# EAGLE board Micro_QWERTY (EAGLE 9.1.3), part 1 of 2
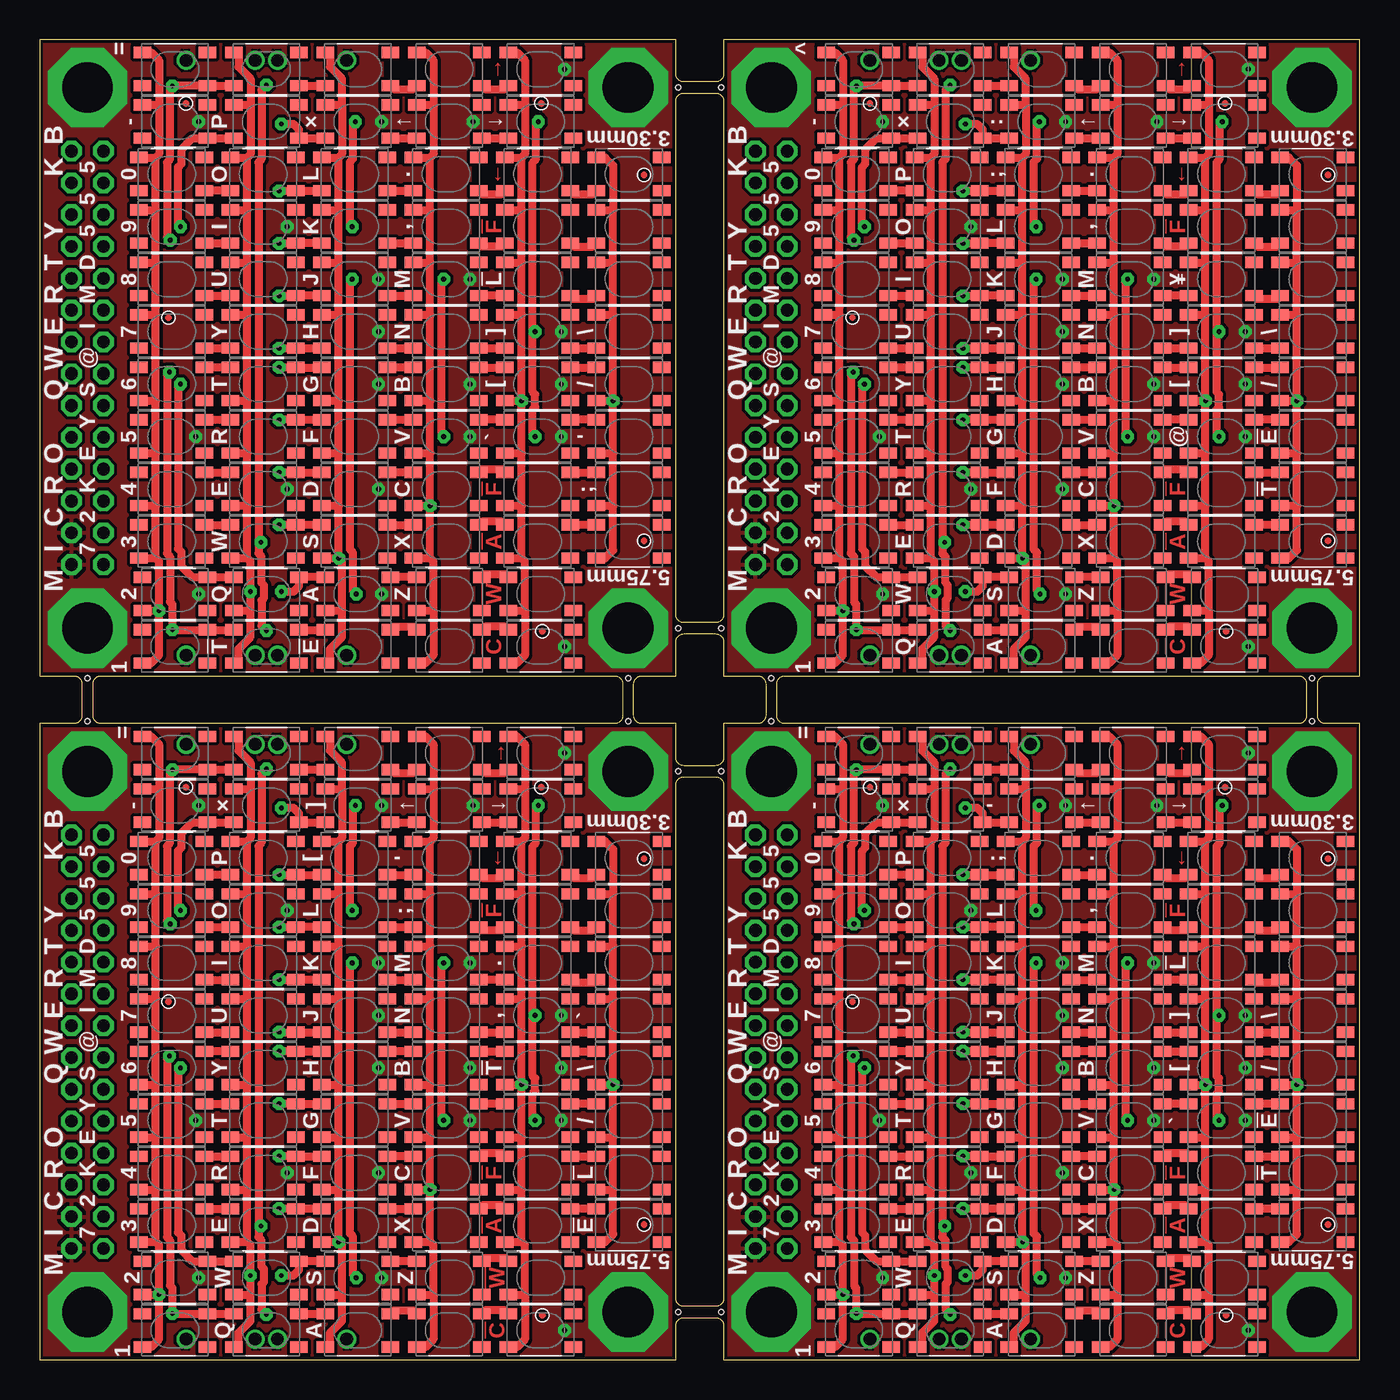
[diagram p0: board, top side]
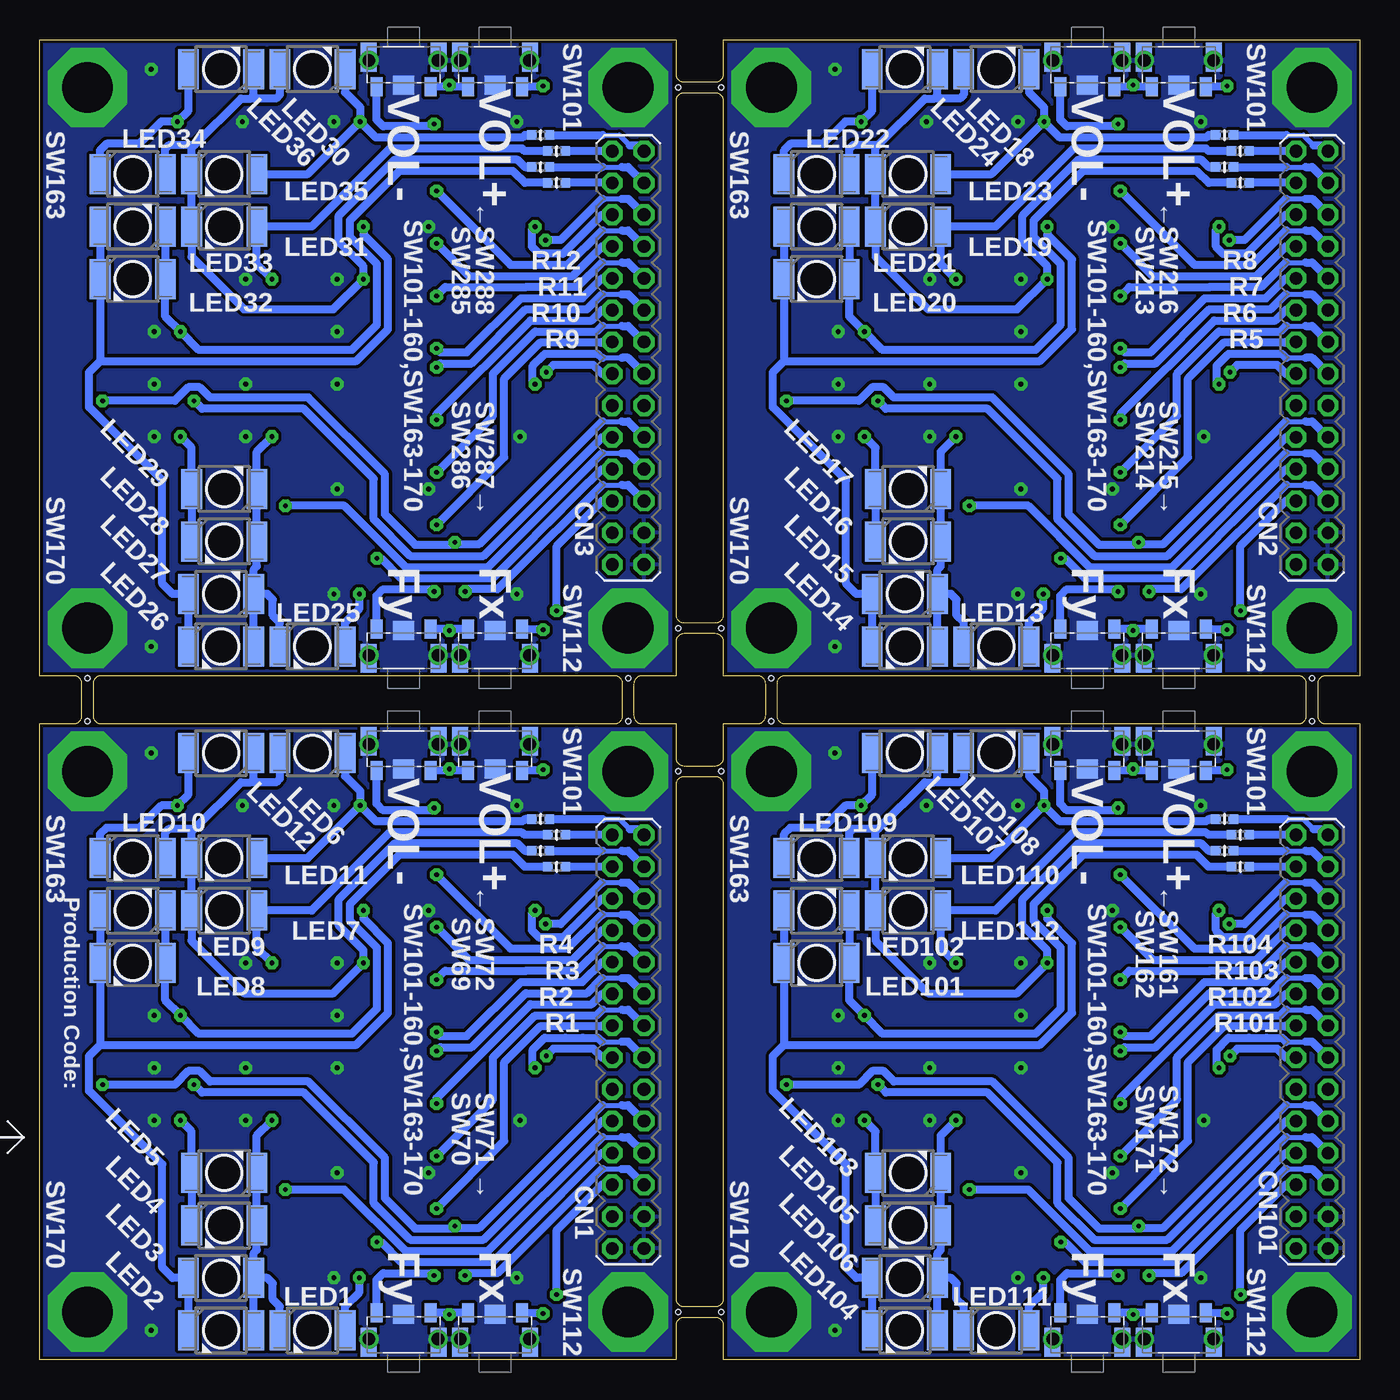
[diagram p1: board, bottom side, seen from below]

Size 83 x 83 mm. Coordinates in mm from the lower left corner, seen from the top.
Outline: 43,0 83,0 83,40 80.85,40 arc-90 80.35,40.5 80.35,42.5 arc-90 80.85,43 83,43 83,83 43,83 43,80.85 arc-90 42.5,80.35 40.5,80.35 arc-90 40,80.85 40,83 0,83 0,43 2.15,43 arc-90 2.65,42.5 2.65,40.5 arc-90 2.15,40 0,40 0,0 40,0 40,2.15 arc-90 40.5,2.65 42.5,2.65 arc-90 43,2.15 43,0
Outline: 79.15,40 46.85,40 arc-90 46.35,40.5 46.35,42.5 arc-90 46.85,43 79.15,43 arc-90 79.65,42.5 79.65,40.5 arc-90 79.15,40
Outline: 45.15,40 43,40 43,37.85 arc-90 42.5,37.35 40.5,37.35 arc-90 40,37.85 40,40 37.85,40 arc-90 37.35,40.5 37.35,42.5 arc-90 37.85,43 40,43 40,45.15 arc-90 40.5,45.65 42.5,45.65 arc-90 43,45.15 43,43 45.15,43 arc-90 45.65,42.5 45.65,40.5 arc-90 45.15,40
Outline: 43,36.15 43,3.85 arc-90 42.5,3.35 40.5,3.35 arc-90 40,3.85 40,36.15 arc-90 40.5,36.65 42.5,36.65 arc-90 43,36.15
Outline: 36.15,40 3.85,40 arc-90 3.35,40.5 3.35,42.5 arc-90 3.85,43 36.15,43 arc-90 36.65,42.5 36.65,40.5 arc-90 36.15,40
Outline: 40,46.85 40,79.15 arc-90 40.5,79.65 42.5,79.65 arc-90 43,79.15 43,46.85 arc-90 42.5,46.35 40.5,46.35 arc-90 40,46.85
Copper layers (1*16): Top 0.035mm / dielectric 1.5mm / Bottom 0.035mm
Design rules "SeeedStudio_2layer_DRU_no_angle_20140221_IMD555 *": minimum track width 0.2mm, minimum drill 0.3mm, track to track 0.2mm, track to pad 0.16mm, pad to pad 0.2mm, via to via 0.2mm, smd to smd 0mil, copper to edge 0.2mm, drill to drill 10mil, minimum pad ring 0.2mm, minimum via ring 0.2mm, stop-mask expansion 0.03mm, vias tented up to drill 5mm, thermal gap 10mil
Holes 0.3 mm at 42.85,37 42.85,3 40.15,3 40.15,37 3,40.15 37,40.15 80,40.15 46,40.15 40.15,46 40.15,80 42.85,80 42.85,46 80,42.85 46,42.85 3,42.85 37,42.85
tRestrict: area 0,39.8 to 83,43.2; area 39.8,0 to 43.2,83
bRestrict: area 39.8,0 to 43.2,83; area 0,39.8 to 83,43.2

## Footprints (pad centres in the part's own frame; a part is rotated, then mirrored left to right if it is on the bottom)
2MM_14X2_R = drill 0.8 pad 1.3 octagon: 1 -13,1; 2 -13,-1; 3 -11,1; 4 -11,-1; 5 -9,1; 6 -9,-1; 7 -7,1; 8 -7,-1; 9 -5,1; 10 -5,-1; 11 -3,1; 12 -3,-1; 13 -1,1; 14 -1,-1; 15 1,1; 16 1,-1; 17 3,1; 18 3,-1; 19 5,1; 20 5,-1; 21 7,1; 22 7,-1; 23 9,1; 24 9,-1; 25 11,1; 26 11,-1; 27 13,1; 28 13,-1
P-LCC-2-TOPLED-RG-WINDOW = smd 2.5 x 1.3: A 0,2.05; C 0,-2.05
R0402-SS = smd 0.6 x 0.6: 1 -0.55,0; 2 0.55,0
TVAU10-025 = smd 1.1 x 0.7: P$1 -2.05,1.05; P$2 2.05,1.05; P$3 -2.05,-1.05; P$4 2.05,-1.05
THAM05 = smd 0.75 x 1.2: P$1 -1.7,-1.65; P$2 1.7,-1.65 | drill 0.8 pad 0.8: S1 -2.175,0; S2 2.175,0 | smd 1.3 x 1.2: S3 0,-1.55 | smd 1 x 1.8: S4 -2.2,0.2; S5 2.2,0.2

## Placement (x,y rotation side)
CN1  14X2R  [2MM_14X2_R]  46,20 90 bottom
CN2  14X2R  [2MM_14X2_R]  3,63 90 bottom
CN3  14X2R  [2MM_14X2_R]  46,63 90 bottom
CN101  14X2R  [2MM_14X2_R]  3,20 90 bottom
LED1  Shift_Left  [P-LCC-2-TOPLED-RG-WINDOW]  65.85,1.85 270 bottom
LED2  Ctrl  [P-LCC-2-TOPLED-RG-WINDOW]  71.6,1.85 270 bottom
LED3  Win  [P-LCC-2-TOPLED-RG-WINDOW]  71.6,5.15 90 bottom
LED4  Alt  [P-LCC-2-TOPLED-RG-WINDOW]  71.4,8.45 270 bottom
LED5  Fn_Left  [P-LCC-2-TOPLED-RG-WINDOW]  71.4,11.75 90 bottom
LED6  Shift_Right  [P-LCC-2-TOPLED-RG-WINDOW]  65.85,38.15 90 bottom
LED7  Fn_Right  [P-LCC-2-TOPLED-RG-WINDOW]  71.4,28.25 270 bottom
LED8  M1  [P-LCC-2-TOPLED-RG-WINDOW]  77.15,24.95 270 bottom
LED9  M2  [P-LCC-2-TOPLED-RG-WINDOW]  77.15,28.25 90 bottom
LED10  M3  [P-LCC-2-TOPLED-RG-WINDOW]  77.15,31.55 270 bottom
LED11  Cursor_Left  [P-LCC-2-TOPLED-RG-WINDOW]  71.4,31.55 270 bottom
LED12  Cursor_Right  [P-LCC-2-TOPLED-RG-WINDOW]  71.6,38.15 90 bottom
LED13  Shift_Left  [P-LCC-2-TOPLED-RG-WINDOW]  22.85,44.85 270 bottom
LED14  Ctrl  [P-LCC-2-TOPLED-RG-WINDOW]  28.6,44.85 270 bottom
LED15  Win  [P-LCC-2-TOPLED-RG-WINDOW]  28.6,48.15 90 bottom
LED16  Alt  [P-LCC-2-TOPLED-RG-WINDOW]  28.4,51.45 270 bottom
LED17  Fn_Left  [P-LCC-2-TOPLED-RG-WINDOW]  28.4,54.75 90 bottom
LED18  Shift_Right  [P-LCC-2-TOPLED-RG-WINDOW]  22.85,81.15 90 bottom
LED19  Fn_Right  [P-LCC-2-TOPLED-RG-WINDOW]  28.4,71.25 270 bottom
LED20  M1  [P-LCC-2-TOPLED-RG-WINDOW]  34.15,67.95 270 bottom
LED21  M2  [P-LCC-2-TOPLED-RG-WINDOW]  34.15,71.25 90 bottom
LED22  M3  [P-LCC-2-TOPLED-RG-WINDOW]  34.15,74.55 270 bottom
LED23  Cursor_Left  [P-LCC-2-TOPLED-RG-WINDOW]  28.4,74.55 270 bottom
LED24  Cursor_Right  [P-LCC-2-TOPLED-RG-WINDOW]  28.6,81.15 90 bottom
LED25  Shift_Left  [P-LCC-2-TOPLED-RG-WINDOW]  65.85,44.85 270 bottom
LED26  Ctrl  [P-LCC-2-TOPLED-RG-WINDOW]  71.6,44.85 270 bottom
LED27  Win  [P-LCC-2-TOPLED-RG-WINDOW]  71.6,48.15 90 bottom
LED28  Alt  [P-LCC-2-TOPLED-RG-WINDOW]  71.4,51.45 270 bottom
LED29  Fn_Left  [P-LCC-2-TOPLED-RG-WINDOW]  71.4,54.75 90 bottom
LED30  Shift_Right  [P-LCC-2-TOPLED-RG-WINDOW]  65.85,81.15 90 bottom
LED31  Fn_Right  [P-LCC-2-TOPLED-RG-WINDOW]  71.4,71.25 270 bottom
LED32  M1  [P-LCC-2-TOPLED-RG-WINDOW]  77.15,67.95 270 bottom
LED33  M2  [P-LCC-2-TOPLED-RG-WINDOW]  77.15,71.25 90 bottom
LED34  M3  [P-LCC-2-TOPLED-RG-WINDOW]  77.15,74.55 270 bottom
LED35  Cursor_Left  [P-LCC-2-TOPLED-RG-WINDOW]  71.4,74.55 270 bottom
LED36  Cursor_Right  [P-LCC-2-TOPLED-RG-WINDOW]  71.6,81.15 90 bottom
LED101  M1  [P-LCC-2-TOPLED-RG-WINDOW]  34.15,24.95 270 bottom
LED102  M2  [P-LCC-2-TOPLED-RG-WINDOW]  34.15,28.25 90 bottom
LED103  Fn_Left  [P-LCC-2-TOPLED-RG-WINDOW]  28.4,11.75 90 bottom
LED104  Ctrl  [P-LCC-2-TOPLED-RG-WINDOW]  28.6,1.85 270 bottom
LED105  Alt  [P-LCC-2-TOPLED-RG-WINDOW]  28.4,8.45 270 bottom
LED106  Win  [P-LCC-2-TOPLED-RG-WINDOW]  28.6,5.15 90 bottom
LED107  Cursor_Right  [P-LCC-2-TOPLED-RG-WINDOW]  28.6,38.15 90 bottom
LED108  Shift_Right  [P-LCC-2-TOPLED-RG-WINDOW]  22.85,38.15 90 bottom
LED109  M3  [P-LCC-2-TOPLED-RG-WINDOW]  34.15,31.55 270 bottom
LED110  Cursor_Left  [P-LCC-2-TOPLED-RG-WINDOW]  28.4,31.55 270 bottom
LED111  Shift_Left  [P-LCC-2-TOPLED-RG-WINDOW]  22.85,1.85 270 bottom
LED112  Fn_Right  [P-LCC-2-TOPLED-RG-WINDOW]  28.4,28.25 270 bottom
R1  [R0402-SS]  50.5,31 0 bottom
R2  [R0402-SS]  51.5,32 0 bottom
R3  [R0402-SS]  50.5,33 0 bottom
R4  [R0402-SS]  51.5,34 0 bottom
R5  [R0402-SS]  7.5,74 0 bottom
R6  [R0402-SS]  8.5,75 0 bottom
R7  [R0402-SS]  7.5,76 0 bottom
R8  [R0402-SS]  8.5,77 0 bottom
R9  [R0402-SS]  50.5,74 0 bottom
R10  [R0402-SS]  51.5,75 0 bottom
R11  [R0402-SS]  50.5,76 0 bottom
R12  [R0402-SS]  51.5,77 0 bottom
R101  [R0402-SS]  7.5,31 0 bottom
R102  [R0402-SS]  8.5,32 0 bottom
R103  [R0402-SS]  7.5,33 0 bottom
R104  [R0402-SS]  8.5,34 0 bottom
SW1  SKRP(ALPS)  [TVAU10-025]  51.5,1.85 0 top
SW2  SW_4PTVAU10-025  [TVAU10-025]  57.25,1.85 0 top
SW3  SW_4PTVAU10-025  [TVAU10-025]  63,1.85 0 top
SW4  SW_4PTVAU10-025  [TVAU10-025]  68.75,1.85 0 top
SW5  SW_4PTVAU10-025  [TVAU10-025]  74.5,1.85 0 top
SW6  SW_4PTVAU10-025  [TVAU10-025]  51.5,5.15 0 top
SW7  SW_4PTVAU10-025  [TVAU10-025]  57.25,5.15 0 top
SW8  SW_4PTVAU10-025  [TVAU10-025]  63,5.15 0 top
SW9  SW_4PTVAU10-025  [TVAU10-025]  68.75,5.15 0 top
SW10  SW_4PTVAU10-025  [TVAU10-025]  74.5,5.15 0 top
SW11  SW_4PTVAU10-025  [TVAU10-025]  51.3,8.45 0 top
SW12  SW_4PTVAU10-025  [TVAU10-025]  57.05,8.45 0 top
SW13  SW_4PTVAU10-025  [TVAU10-025]  62.8,8.45 0 top
SW14  SW_4PTVAU10-025  [TVAU10-025]  68.55,8.45 0 top
SW15  SW_4PTVAU10-025  [TVAU10-025]  74.3,8.45 0 top
SW16  SW_4PTVAU10-025  [TVAU10-025]  80.05,8.45 0 top
SW17  SW_4PTVAU10-025  [TVAU10-025]  51.3,11.75 0 top
SW18  SW_4PTVAU10-025  [TVAU10-025]  57.05,11.75 0 top
SW19  SW_4PTVAU10-025  [TVAU10-025]  62.8,11.75 0 top
SW20  SW_4PTVAU10-025  [TVAU10-025]  68.55,11.75 0 top
SW21  SW_4PTVAU10-025  [TVAU10-025]  74.3,11.75 0 top
SW22  SW_4PTVAU10-025  [TVAU10-025]  80.05,11.75 0 top
SW23  SW_4PTVAU10-025  [TVAU10-025]  51.3,15.05 0 top
SW24  SW_4PTVAU10-025  [TVAU10-025]  57.05,15.05 0 top
SW25  SW_4PTVAU10-025  [TVAU10-025]  62.8,15.05 0 top
SW26  SW_4PTVAU10-025  [TVAU10-025]  68.55,15.05 0 top
SW27  SW_4PTVAU10-025  [TVAU10-025]  74.3,15.05 0 top
SW28  SW_4PTVAU10-025  [TVAU10-025]  80.05,15.05 0 top
SW29  SW_4PTVAU10-025  [TVAU10-025]  51.3,18.35 0 top
SW30  SW_4PTVAU10-025  [TVAU10-025]  57.05,18.35 0 top
SW31  SW_4PTVAU10-025  [TVAU10-025]  62.8,18.35 0 top
SW32  SW_4PTVAU10-025  [TVAU10-025]  68.55,18.35 0 top
SW33  SW_4PTVAU10-025  [TVAU10-025]  74.3,18.35 0 top
SW34  SW_4PTVAU10-025  [TVAU10-025]  80.05,18.35 0 top
SW35  SW_4PTVAU10-025  [TVAU10-025]  51.3,21.65 0 top
SW36  SW_4PTVAU10-025  [TVAU10-025]  57.05,21.65 0 top
SW37  SW_4PTVAU10-025  [TVAU10-025]  62.8,21.65 0 top
SW38  SW_4PTVAU10-025  [TVAU10-025]  68.55,21.65 0 top
SW39  SW_4PTVAU10-025  [TVAU10-025]  74.3,21.65 0 top
SW40  SW_4PTVAU10-025  [TVAU10-025]  80.05,21.65 0 top
SW41  SW_4PTVAU10-025  [TVAU10-025]  51.3,24.95 0 top
SW42  SW_4PTVAU10-025  [TVAU10-025]  57.05,24.95 0 top
SW43  SW_4PTVAU10-025  [TVAU10-025]  62.8,24.95 0 top
SW44  SW_4PTVAU10-025  [TVAU10-025]  68.55,24.95 0 top
SW45  SW_4PTVAU10-025  [TVAU10-025]  74.3,24.95 0 top
SW46  SW_4PTVAU10-025  [TVAU10-025]  80.05,24.95 0 top
SW47  SW_4PTVAU10-025  [TVAU10-025]  51.3,28.25 0 top
SW48  SW_4PTVAU10-025  [TVAU10-025]  57.05,28.25 0 top
SW49  SW_4PTVAU10-025  [TVAU10-025]  62.8,28.25 0 top
SW50  SW_4PTVAU10-025  [TVAU10-025]  68.55,28.25 0 top
SW51  SW_4PTVAU10-025  [TVAU10-025]  74.3,28.25 0 top
SW52  SW_4PTVAU10-025  [TVAU10-025]  80.05,28.25 0 top
SW53  SW_4PTVAU10-025  [TVAU10-025]  51.3,31.55 0 top
SW54  SW_4PTVAU10-025  [TVAU10-025]  57.05,31.55 0 top
SW55  SW_4PTVAU10-025  [TVAU10-025]  62.8,31.55 0 top
SW56  SW_4PTVAU10-025  [TVAU10-025]  68.55,31.55 0 top
SW57  SW_4PTVAU10-025  [TVAU10-025]  74.3,31.55 0 top
SW58  SW_4PTVAU10-025  [TVAU10-025]  80.05,31.55 0 top
SW59  SW_4PTVAU10-025  [TVAU10-025]  51.5,34.85 0 top
SW60  SW_4PTVAU10-025  [TVAU10-025]  57.25,34.85 0 top
SW61  SW_4PTVAU10-025  [TVAU10-025]  63,34.85 0 top
SW62  SW_4PTVAU10-025  [TVAU10-025]  68.75,34.85 0 top
SW63  SW_4PTVAU10-025  [TVAU10-025]  74.5,34.85 0 top
SW64  SW_4PTVAU10-025  [TVAU10-025]  51.5,38.15 0 top
SW65  SW_4PTVAU10-025  [TVAU10-025]  57.25,38.15 0 top
SW66  SW_4PTVAU10-025  [TVAU10-025]  63,38.15 0 top
SW67  SW_4PTVAU10-025  [TVAU10-025]  68.75,38.15 0 top
SW68  SW_4PTVAU10-025  [TVAU10-025]  74.5,38.15 0 top
SW69  SW_WITH_EARTHX  [THAM05]  60.12,38.7 0 bottom
SW70  SW_WITH_EARTHX  [THAM05]  60.12,1.3 180 bottom
SW71  THAM05 or TS-018A  [THAM05]  54.38,1.3 180 bottom
SW72  SW_WITH_EARTHX  [THAM05]  54.38,38.7 0 bottom
SW73  SKRP(ALPS)  [TVAU10-025]  8.5,44.85 0 top
SW74  SW_4PTVAU10-025  [TVAU10-025]  14.25,44.85 0 top
SW75  SW_4PTVAU10-025  [TVAU10-025]  20,44.85 0 top
SW76  SW_4PTVAU10-025  [TVAU10-025]  25.75,44.85 0 top
SW77  SW_4PTVAU10-025  [TVAU10-025]  31.5,44.85 0 top
SW78  SW_4PTVAU10-025  [TVAU10-025]  8.5,48.15 0 top
SW79  SW_4PTVAU10-025  [TVAU10-025]  14.25,48.15 0 top
SW80  SW_4PTVAU10-025  [TVAU10-025]  20,48.15 0 top
SW81  SW_4PTVAU10-025  [TVAU10-025]  25.75,48.15 0 top
SW82  SW_4PTVAU10-025  [TVAU10-025]  31.5,48.15 0 top
SW83  SW_4PTVAU10-025  [TVAU10-025]  8.3,51.45 0 top
SW84  SW_4PTVAU10-025  [TVAU10-025]  14.05,51.45 0 top
SW85  SW_4PTVAU10-025  [TVAU10-025]  19.8,51.45 0 top
SW86  SW_4PTVAU10-025  [TVAU10-025]  25.55,51.45 0 top
SW87  SW_4PTVAU10-025  [TVAU10-025]  31.3,51.45 0 top
SW88  SW_4PTVAU10-025  [TVAU10-025]  37.05,51.45 0 top
SW89  SW_4PTVAU10-025  [TVAU10-025]  8.3,54.75 0 top
SW90  SW_4PTVAU10-025  [TVAU10-025]  14.05,54.75 0 top
SW91  SW_4PTVAU10-025  [TVAU10-025]  19.8,54.75 0 top
SW92  SW_4PTVAU10-025  [TVAU10-025]  25.55,54.75 0 top
SW93  SW_4PTVAU10-025  [TVAU10-025]  31.3,54.75 0 top
SW94  SW_4PTVAU10-025  [TVAU10-025]  37.05,54.75 0 top
SW95  SW_4PTVAU10-025  [TVAU10-025]  8.3,58.05 0 top
SW96  SW_4PTVAU10-025  [TVAU10-025]  14.05,58.05 0 top
SW97  SW_4PTVAU10-025  [TVAU10-025]  19.8,58.05 0 top
SW98  SW_4PTVAU10-025  [TVAU10-025]  25.55,58.05 0 top
SW99  SW_4PTVAU10-025  [TVAU10-025]  31.3,58.05 0 top
SW100  SW_4PTVAU10-025  [TVAU10-025]  37.05,58.05 0 top
SW101  SW_4PTVAU10-025  [TVAU10-025]  8.5,38.15 0 top
SW102  SW_4PTVAU10-025  [TVAU10-025]  8.5,34.85 0 top
SW103  SW_4PTVAU10-025  [TVAU10-025]  8.3,31.55 0 top
SW104  SW_4PTVAU10-025  [TVAU10-025]  8.3,28.25 0 top
SW105  SW_4PTVAU10-025  [TVAU10-025]  8.3,24.95 0 top
SW106  SW_4PTVAU10-025  [TVAU10-025]  8.3,21.65 0 top
SW107  SW_4PTVAU10-025  [TVAU10-025]  8.3,18.35 0 top
SW108  SW_4PTVAU10-025  [TVAU10-025]  8.3,15.05 0 top
SW109  SW_4PTVAU10-025  [TVAU10-025]  8.3,11.75 0 top
SW110  SW_4PTVAU10-025  [TVAU10-025]  8.3,8.45 0 top
SW111  SW_4PTVAU10-025  [TVAU10-025]  8.5,5.15 0 top
SW112  SKRP(ALPS)  [TVAU10-025]  8.5,1.85 0 top
SW113  SW_4PTVAU10-025  [TVAU10-025]  14.25,38.15 0 top
SW114  SW_4PTVAU10-025  [TVAU10-025]  14.25,34.85 0 top
SW115  SW_4PTVAU10-025  [TVAU10-025]  14.05,31.55 0 top
SW116  SW_4PTVAU10-025  [TVAU10-025]  14.05,28.25 0 top
SW117  SW_4PTVAU10-025  [TVAU10-025]  14.05,24.95 0 top
SW118  SW_4PTVAU10-025  [TVAU10-025]  14.05,21.65 0 top
SW119  SW_4PTVAU10-025  [TVAU10-025]  14.05,18.35 0 top
SW120  SW_4PTVAU10-025  [TVAU10-025]  14.05,15.05 0 top
SW121  SW_4PTVAU10-025  [TVAU10-025]  14.05,11.75 0 top
SW122  SW_4PTVAU10-025  [TVAU10-025]  14.05,8.45 0 top
SW123  SW_4PTVAU10-025  [TVAU10-025]  14.25,5.15 0 top
SW124  SW_4PTVAU10-025  [TVAU10-025]  14.25,1.85 0 top
SW125  SW_4PTVAU10-025  [TVAU10-025]  20,38.15 0 top
SW126  SW_4PTVAU10-025  [TVAU10-025]  20,34.85 0 top
SW127  SW_4PTVAU10-025  [TVAU10-025]  19.8,31.55 0 top
SW128  SW_4PTVAU10-025  [TVAU10-025]  19.8,28.25 0 top
SW129  SW_4PTVAU10-025  [TVAU10-025]  19.8,24.95 0 top
SW130  SW_4PTVAU10-025  [TVAU10-025]  19.8,21.65 0 top
SW131  SW_4PTVAU10-025  [TVAU10-025]  19.8,18.35 0 top
SW132  SW_4PTVAU10-025  [TVAU10-025]  19.8,15.05 0 top
SW133  SW_4PTVAU10-025  [TVAU10-025]  19.8,11.75 0 top
SW134  SW_4PTVAU10-025  [TVAU10-025]  19.8,8.45 0 top
SW135  SW_4PTVAU10-025  [TVAU10-025]  20,5.15 0 top
SW136  SW_4PTVAU10-025  [TVAU10-025]  20,1.85 0 top
SW137  SW_4PTVAU10-025  [TVAU10-025]  25.75,38.15 0 top
SW138  SW_4PTVAU10-025  [TVAU10-025]  25.75,34.85 0 top
SW139  SW_4PTVAU10-025  [TVAU10-025]  25.55,31.55 0 top
SW140  SW_4PTVAU10-025  [TVAU10-025]  25.55,28.25 0 top
SW141  SW_4PTVAU10-025  [TVAU10-025]  25.55,24.95 0 top
SW142  SW_4PTVAU10-025  [TVAU10-025]  25.55,21.65 0 top
SW143  SW_4PTVAU10-025  [TVAU10-025]  25.55,18.35 0 top
SW144  SW_4PTVAU10-025  [TVAU10-025]  25.55,15.05 0 top
SW145  SW_4PTVAU10-025  [TVAU10-025]  25.55,11.75 0 top
SW146  SW_4PTVAU10-025  [TVAU10-025]  25.55,8.45 0 top
SW147  SW_4PTVAU10-025  [TVAU10-025]  25.75,5.15 0 top
SW148  SW_4PTVAU10-025  [TVAU10-025]  25.75,1.85 0 top
SW149  SW_4PTVAU10-025  [TVAU10-025]  31.5,38.15 0 top
SW150  SW_4PTVAU10-025  [TVAU10-025]  31.5,34.85 0 top
SW151  SW_4PTVAU10-025  [TVAU10-025]  31.3,31.55 0 top
SW152  SW_4PTVAU10-025  [TVAU10-025]  31.3,28.25 0 top
SW153  SW_4PTVAU10-025  [TVAU10-025]  31.3,24.95 0 top
SW154  SW_4PTVAU10-025  [TVAU10-025]  31.3,21.65 0 top
SW155  SW_4PTVAU10-025  [TVAU10-025]  31.3,18.35 0 top
SW156  SW_4PTVAU10-025  [TVAU10-025]  31.3,15.05 0 top
SW157  SW_4PTVAU10-025  [TVAU10-025]  31.3,11.75 0 top
SW158  SW_4PTVAU10-025  [TVAU10-025]  31.3,8.45 0 top
SW159  SW_4PTVAU10-025  [TVAU10-025]  31.5,5.15 0 top
SW160  SW_4PTVAU10-025  [TVAU10-025]  31.5,1.85 0 top
SW161  SW_WITH_EARTHX  [THAM05]  11.38,38.7 0 bottom
SW162  SW_WITH_EARTHX  [THAM05]  17.12,38.7 0 bottom
SW163  SW_4PTVAU10-025  [TVAU10-025]  37.05,31.55 0 top
SW164  SW_4PTVAU10-025  [TVAU10-025]  37.05,28.25 0 top
SW165  SW_4PTVAU10-025  [TVAU10-025]  37.05,24.95 0 top
SW166  SW_4PTVAU10-025  [TVAU10-025]  37.05,21.65 0 top
SW167  SW_4PTVAU10-025  [TVAU10-025]  37.05,18.35 0 top
SW168  SW_4PTVAU10-025  [TVAU10-025]  37.05,15.05 0 top
SW169  SW_4PTVAU10-025  [TVAU10-025]  37.05,11.75 0 top
SW170  SW_4PTVAU10-025  [TVAU10-025]  37.05,8.45 0 top
SW171  SW_WITH_EARTHX  [THAM05]  17.12,1.3 180 bottom
SW172  THAM05 or TS-018A  [THAM05]  11.38,1.3 180 bottom
SW173  SW_4PTVAU10-025  [TVAU10-025]  8.3,61.35 0 top
SW174  SW_4PTVAU10-025  [TVAU10-025]  14.05,61.35 0 top
SW175  SW_4PTVAU10-025  [TVAU10-025]  19.8,61.35 0 top
SW176  SW_4PTVAU10-025  [TVAU10-025]  25.55,61.35 0 top
SW177  SW_4PTVAU10-025  [TVAU10-025]  31.3,61.35 0 top
SW178  SW_4PTVAU10-025  [TVAU10-025]  37.05,61.35 0 top
SW179  SW_4PTVAU10-025  [TVAU10-025]  8.3,64.65 0 top
SW180  SW_4PTVAU10-025  [TVAU10-025]  14.05,64.65 0 top
SW181  SW_4PTVAU10-025  [TVAU10-025]  19.8,64.65 0 top
SW182  SW_4PTVAU10-025  [TVAU10-025]  25.55,64.65 0 top
SW183  SW_4PTVAU10-025  [TVAU10-025]  31.3,64.65 0 top
SW184  SW_4PTVAU10-025  [TVAU10-025]  37.05,64.65 0 top
SW185  SW_4PTVAU10-025  [TVAU10-025]  8.3,67.95 0 top
SW186  SW_4PTVAU10-025  [TVAU10-025]  14.05,67.95 0 top
SW187  SW_4PTVAU10-025  [TVAU10-025]  19.8,67.95 0 top
SW188  SW_4PTVAU10-025  [TVAU10-025]  25.55,67.95 0 top
SW189  SW_4PTVAU10-025  [TVAU10-025]  31.3,67.95 0 top
SW190  SW_4PTVAU10-025  [TVAU10-025]  37.05,67.95 0 top
SW191  SW_4PTVAU10-025  [TVAU10-025]  8.3,71.25 0 top
SW192  SW_4PTVAU10-025  [TVAU10-025]  14.05,71.25 0 top
SW193  SW_4PTVAU10-025  [TVAU10-025]  19.8,71.25 0 top
SW194  SW_4PTVAU10-025  [TVAU10-025]  25.55,71.25 0 top
SW195  SW_4PTVAU10-025  [TVAU10-025]  31.3,71.25 0 top
SW196  SW_4PTVAU10-025  [TVAU10-025]  37.05,71.25 0 top
SW197  SW_4PTVAU10-025  [TVAU10-025]  8.3,74.55 0 top
SW198  SW_4PTVAU10-025  [TVAU10-025]  14.05,74.55 0 top
SW199  SW_4PTVAU10-025  [TVAU10-025]  19.8,74.55 0 top
SW200  SW_4PTVAU10-025  [TVAU10-025]  25.55,74.55 0 top
SW201  SW_4PTVAU10-025  [TVAU10-025]  31.3,74.55 0 top
SW202  SW_4PTVAU10-025  [TVAU10-025]  37.05,74.55 0 top
SW203  SW_4PTVAU10-025  [TVAU10-025]  8.5,77.85 0 top
SW204  SW_4PTVAU10-025  [TVAU10-025]  14.25,77.85 0 top
SW205  SW_4PTVAU10-025  [TVAU10-025]  20,77.85 0 top
SW206  SW_4PTVAU10-025  [TVAU10-025]  25.75,77.85 0 top
SW207  SW_4PTVAU10-025  [TVAU10-025]  31.5,77.85 0 top
SW208  SW_4PTVAU10-025  [TVAU10-025]  8.5,81.15 0 top
SW209  SW_4PTVAU10-025  [TVAU10-025]  14.25,81.15 0 top
SW210  SW_4PTVAU10-025  [TVAU10-025]  20,81.15 0 top
SW211  SW_4PTVAU10-025  [TVAU10-025]  25.75,81.15 0 top
SW212  SW_4PTVAU10-025  [TVAU10-025]  31.5,81.15 0 top
SW213  SW_WITH_EARTHX  [THAM05]  17.12,81.7 0 bottom
SW214  SW_WITH_EARTHX  [THAM05]  17.12,44.3 180 bottom
SW215  THAM05 or TS-018A  [THAM05]  11.38,44.3 180 bottom
SW216  SW_WITH_EARTHX  [THAM05]  11.38,81.7 0 bottom
SW217  SKRP(ALPS)  [TVAU10-025]  51.5,44.85 0 top
SW218  SW_4PTVAU10-025  [TVAU10-025]  57.25,44.85 0 top
SW219  SW_4PTVAU10-025  [TVAU10-025]  63,44.85 0 top
SW220  SW_4PTVAU10-025  [TVAU10-025]  68.75,44.85 0 top
SW221  SW_4PTVAU10-025  [TVAU10-025]  74.5,44.85 0 top
SW222  SW_4PTVAU10-025  [TVAU10-025]  51.5,48.15 0 top
SW223  SW_4PTVAU10-025  [TVAU10-025]  57.25,48.15 0 top
SW224  SW_4PTVAU10-025  [TVAU10-025]  63,48.15 0 top
SW225  SW_4PTVAU10-025  [TVAU10-025]  68.75,48.15 0 top
SW226  SW_4PTVAU10-025  [TVAU10-025]  74.5,48.15 0 top
SW227  SW_4PTVAU10-025  [TVAU10-025]  51.3,51.45 0 top
SW228  SW_4PTVAU10-025  [TVAU10-025]  57.05,51.45 0 top
SW229  SW_4PTVAU10-025  [TVAU10-025]  62.8,51.45 0 top
SW230  SW_4PTVAU10-025  [TVAU10-025]  68.55,51.45 0 top
SW231  SW_4PTVAU10-025  [TVAU10-025]  74.3,51.45 0 top
SW232  SW_4PTVAU10-025  [TVAU10-025]  80.05,51.45 0 top
SW233  SW_4PTVAU10-025  [TVAU10-025]  51.3,54.75 0 top
SW234  SW_4PTVAU10-025  [TVAU10-025]  57.05,54.75 0 top
SW235  SW_4PTVAU10-025  [TVAU10-025]  62.8,54.75 0 top
SW236  SW_4PTVAU10-025  [TVAU10-025]  68.55,54.75 0 top
SW237  SW_4PTVAU10-025  [TVAU10-025]  74.3,54.75 0 top
SW238  SW_4PTVAU10-025  [TVAU10-025]  80.05,54.75 0 top
SW239  SW_4PTVAU10-025  [TVAU10-025]  51.3,58.05 0 top
SW240  SW_4PTVAU10-025  [TVAU10-025]  57.05,58.05 0 top
SW241  SW_4PTVAU10-025  [TVAU10-025]  62.8,58.05 0 top
SW242  SW_4PTVAU10-025  [TVAU10-025]  68.55,58.05 0 top
SW243  SW_4PTVAU10-025  [TVAU10-025]  74.3,58.05 0 top
SW244  SW_4PTVAU10-025  [TVAU10-025]  80.05,58.05 0 top
SW245  SW_4PTVAU10-025  [TVAU10-025]  51.3,61.35 0 top
SW246  SW_4PTVAU10-025  [TVAU10-025]  57.05,61.35 0 top
SW247  SW_4PTVAU10-025  [TVAU10-025]  62.8,61.35 0 top
SW248  SW_4PTVAU10-025  [TVAU10-025]  68.55,61.35 0 top
SW249  SW_4PTVAU10-025  [TVAU10-025]  74.3,61.35 0 top
SW250  SW_4PTVAU10-025  [TVAU10-025]  80.05,61.35 0 top
SW251  SW_4PTVAU10-025  [TVAU10-025]  51.3,64.65 0 top
SW252  SW_4PTVAU10-025  [TVAU10-025]  57.05,64.65 0 top
SW253  SW_4PTVAU10-025  [TVAU10-025]  62.8,64.65 0 top
SW254  SW_4PTVAU10-025  [TVAU10-025]  68.55,64.65 0 top
SW255  SW_4PTVAU10-025  [TVAU10-025]  74.3,64.65 0 top
SW256  SW_4PTVAU10-025  [TVAU10-025]  80.05,64.65 0 top
SW257  SW_4PTVAU10-025  [TVAU10-025]  51.3,67.95 0 top
SW258  SW_4PTVAU10-025  [TVAU10-025]  57.05,67.95 0 top
SW259  SW_4PTVAU10-025  [TVAU10-025]  62.8,67.95 0 top
SW260  SW_4PTVAU10-025  [TVAU10-025]  68.55,67.95 0 top
SW261  SW_4PTVAU10-025  [TVAU10-025]  74.3,67.95 0 top
SW262  SW_4PTVAU10-025  [TVAU10-025]  80.05,67.95 0 top
SW263  SW_4PTVAU10-025  [TVAU10-025]  51.3,71.25 0 top
SW264  SW_4PTVAU10-025  [TVAU10-025]  57.05,71.25 0 top
SW265  SW_4PTVAU10-025  [TVAU10-025]  62.8,71.25 0 top
SW266  SW_4PTVAU10-025  [TVAU10-025]  68.55,71.25 0 top
SW267  SW_4PTVAU10-025  [TVAU10-025]  74.3,71.25 0 top
SW268  SW_4PTVAU10-025  [TVAU10-025]  80.05,71.25 0 top
SW269  SW_4PTVAU10-025  [TVAU10-025]  51.3,74.55 0 top
SW270  SW_4PTVAU10-025  [TVAU10-025]  57.05,74.55 0 top
SW271  SW_4PTVAU10-025  [TVAU10-025]  62.8,74.55 0 top
SW272  SW_4PTVAU10-025  [TVAU10-025]  68.55,74.55 0 top
SW273  SW_4PTVAU10-025  [TVAU10-025]  74.3,74.55 0 top
SW274  SW_4PTVAU10-025  [TVAU10-025]  80.05,74.55 0 top
SW275  SW_4PTVAU10-025  [TVAU10-025]  51.5,77.85 0 top
SW276  SW_4PTVAU10-025  [TVAU10-025]  57.25,77.85 0 top
SW277  SW_4PTVAU10-025  [TVAU10-025]  63,77.85 0 top
SW278  SW_4PTVAU10-025  [TVAU10-025]  68.75,77.85 0 top
SW279  SW_4PTVAU10-025  [TVAU10-025]  74.5,77.85 0 top
SW280  SW_4PTVAU10-025  [TVAU10-025]  51.5,81.15 0 top
SW281  SW_4PTVAU10-025  [TVAU10-025]  57.25,81.15 0 top
SW282  SW_4PTVAU10-025  [TVAU10-025]  63,81.15 0 top
SW283  SW_4PTVAU10-025  [TVAU10-025]  68.75,81.15 0 top
SW284  SW_4PTVAU10-025  [TVAU10-025]  74.5,81.15 0 top
SW285  SW_WITH_EARTHX  [THAM05]  60.12,81.7 0 bottom
SW286  SW_WITH_EARTHX  [THAM05]  60.12,44.3 180 bottom
SW287  THAM05 or TS-018A  [THAM05]  54.38,44.3 180 bottom
SW288  SW_WITH_EARTHX  [THAM05]  54.38,81.7 0 bottom
U$1  [PCB_CHECK]  9.2,36 0 top
U$2  [PCB_CHECK]  52.2,36 0 top
U$3  [PCB_CHECK]  74.6,2.8 0 top
U$4  [PCB_CHECK]  31.6,2.8 0 top
U$5  [PCB_CHECK]  31.53,36.01 0 top
U$6  [PCB_CHECK]  38,31.5 0 top
U$7  [PCB_CHECK]  38,8.5 0 top
U$8  [PCB_CHECK]  8.1,22.52 0 top
U$9  [PCB_CHECK]  74.53,36.01 0 top
U$10  [PCB_CHECK]  81,31.5 0 top
U$11  [PCB_CHECK]  81,8.5 0 top
U$12  [PCB_CHECK]  51.1,22.52 0 top
U$13  [PCB_CHECK]  9.2,79 0 top
U$14  [PCB_CHECK]  31.6,45.8 0 top
U$15  [PCB_CHECK]  31.53,79.01 0 top
U$16  [PCB_CHECK]  38,74.5 0 top
U$17  [PCB_CHECK]  38,51.5 0 top
U$18  [PCB_CHECK]  8.1,65.52 0 top
U$19  [PCB_CHECK]  52.2,79 0 top
U$20  [PCB_CHECK]  74.6,45.8 0 top
U$21  [PCB_CHECK]  74.53,79.01 0 top
U$22  [PCB_CHECK]  81,74.5 0 top
U$23  [PCB_CHECK]  81,51.5 0 top
U$24  [PCB_CHECK]  51.1,65.52 0 top

## Library data of the parts
CN1-CN3 CN101 = 4 _l__l_
LED1-LED36 LED101-LED112 = 8 LED
R1-R12 R101-R104 = 2 RCL
SW1-SW288 U$1-U$24 = 0 my parts

## Nets
C0: CN101.13 SW112.P$2 SW124.P$1 SW172.P$1
C1: CN101.14 SW111.P$2 SW123.P$1
C2: CN101.15 SW122.P$2 SW134.P$1
C3: CN101.16 SW121.P$2 SW133.P$1
C4: CN101.17 SW120.P$2 SW132.P$1
C5: CN101.18 SW119.P$2 SW131.P$1
C6: CN101.19 SW118.P$4 SW130.P$3
C7: CN101.20 SW117.P$4 SW129.P$3
C8: CN101.21 SW116.P$4 SW128.P$3
C9: CN101.22 SW115.P$4 SW127.P$3
C10: CN101.23 SW102.P$4 SW114.P$3
C11: CN101.24 SW101.P$4 SW113.P$3 SW161.P$2
C12: CN1.13 SW1.P$2 SW2.P$1 SW71.P$1
C13: CN1.14 SW6.P$2 SW7.P$1
C14: CN1.15 SW12.P$2 SW13.P$1
C15: CN1.16 SW18.P$2 SW19.P$1
C16: CN1.17 SW24.P$2 SW25.P$1
C17: CN1.18 SW30.P$2 SW31.P$1
C18: CN1.19 SW36.P$4 SW37.P$3
C19: CN1.20 SW42.P$4 SW43.P$3
C20: CN1.21 SW48.P$4 SW49.P$3
C21: CN1.22 SW54.P$4 SW55.P$3
C22: CN1.23 SW59.P$4 SW60.P$3
C23: CN1.24 SW64.P$4 SW65.P$3 SW72.P$2
C24: CN2.13 SW73.P$2 SW74.P$1 SW215.P$1
C25: CN2.14 SW78.P$2 SW79.P$1
C26: CN2.15 SW84.P$2 SW85.P$1
C27: CN2.16 SW90.P$2 SW91.P$1
C28: CN2.17 SW96.P$2 SW97.P$1
C29: CN2.18 SW174.P$2 SW175.P$1
C30: CN2.19 SW180.P$4 SW181.P$3
C31: CN2.20 SW186.P$4 SW187.P$3
C32: CN2.21 SW192.P$4 SW193.P$3
C33: CN2.22 SW198.P$4 SW199.P$3
C34: CN2.23 SW203.P$4 SW204.P$3
C35: CN2.24 SW208.P$4 SW209.P$3 SW216.P$2
C36: CN3.13 SW217.P$2 SW218.P$1 SW287.P$1
C37: CN3.14 SW222.P$2 SW223.P$1
C38: CN3.15 SW228.P$2 SW229.P$1
C39: CN3.16 SW234.P$2 SW235.P$1
C40: CN3.17 SW240.P$2 SW241.P$1
C41: CN3.18 SW246.P$2 SW247.P$1
C42: CN3.19 SW252.P$4 SW253.P$3
C43: CN3.20 SW258.P$4 SW259.P$3
C44: CN3.21 SW264.P$4 SW265.P$3
C45: CN3.22 SW270.P$4 SW271.P$3
C46: CN3.23 SW275.P$4 SW276.P$3
C47: CN3.24 SW280.P$4 SW281.P$3 SW288.P$2
GND: CN101.2 CN101.4 SW161.S1 SW161.S2 SW161.S3 SW161.S4 SW161.S5 SW162.S1 SW162.S2 SW162.S3 SW162.S4 SW162.S5 SW171.S1 SW171.S2 SW171.S3 SW171.S4 SW171.S5 SW172.S1 SW172.S2 SW172.S3 SW172.S4 SW172.S5
GND1: CN1.2 CN1.4 SW69.S1 SW69.S2 SW69.S3 SW69.S4 SW69.S5 SW70.S1 SW70.S2 SW70.S3 SW70.S4 SW70.S5 SW71.S1 SW71.S2 SW71.S3 SW71.S4 SW71.S5 SW72.S1 SW72.S2 SW72.S3 SW72.S4 SW72.S5
GND2: CN2.2 CN2.4 SW213.S1 SW213.S2 SW213.S3 SW213.S4 SW213.S5 SW214.S1 SW214.S2 SW214.S3 SW214.S4 SW214.S5 SW215.S1 SW215.S2 SW215.S3 SW215.S4 SW215.S5 SW216.S1 SW216.S2 SW216.S3 SW216.S4 SW216.S5
GND3: CN3.2 CN3.4 SW285.S1 SW285.S2 SW285.S3 SW285.S4 SW285.S5 SW286.S1 SW286.S2 SW286.S3 SW286.S4 SW286.S5 SW287.S1 SW287.S2 SW287.S3 SW287.S4 SW287.S5 SW288.S1 SW288.S2 SW288.S3 SW288.S4 SW288.S5
L0: CN101.28 R104.2
L1: CN101.27 R103.2
L2: CN101.26 R102.2
L3: CN101.25 R101.2
L4: CN1.26 R2.2
L5: CN1.28 R4.2
L6: CN1.25 R1.2
L7: CN1.27 R3.2
L8: CN2.26 R6.2
L9: CN2.28 R8.2
L10: CN2.25 R5.2
L11: CN2.27 R7.2
L12: CN3.26 R10.2
L13: CN3.28 R12.2
L14: CN3.25 R9.2
L15: CN3.27 R11.2
N$1: LED107.C LED108.A LED109.A LED110.C LED111.A LED112.C R102.1
N$2: LED101.A LED102.C LED103.A LED105.C LED107.A LED109.C R101.1
N$3: LED103.C LED104.A LED105.A LED106.C LED111.C LED112.A R103.1
N$4: LED101.C LED102.A LED104.C LED106.A LED108.C LED110.A R104.1
N$5: SW123.P$2 SW135.P$1 SW171.P$2
N$6: SW113.P$4 SW125.P$3
N$7: SW114.P$4 SW126.P$3 SW162.P$1
N$8: SW29.P$2 SW30.P$1
N$9: SW106.P$4 SW118.P$3
N$10: SW130.P$4 SW142.P$3
N$11: SW154.P$4 SW166.P$3
N$12: SW142.P$4 SW154.P$3
N$13: SW105.P$4 SW117.P$3
N$14: SW129.P$4 SW141.P$3
N$15: SW153.P$4 SW165.P$3
N$16: SW141.P$4 SW153.P$3
N$17: SW104.P$4 SW116.P$3
N$18: SW128.P$4 SW140.P$3
N$19: SW152.P$4 SW164.P$3
N$20: SW140.P$4 SW152.P$3
N$21: SW103.P$4 SW115.P$3
N$22: SW127.P$4 SW139.P$3
N$23: SW151.P$4 SW163.P$3
N$24: SW139.P$4 SW151.P$3
N$25: SW31.P$2 SW32.P$1
N$26: SW126.P$4 SW138.P$3
N$27: SW32.P$2 SW33.P$1
N$28: SW138.P$4 SW150.P$3
N$29: SW33.P$2 SW34.P$1
N$30: SW125.P$4 SW137.P$3
N$31: SW2.P$2 SW3.P$1
N$32: SW137.P$4 SW149.P$3
N$33: SW3.P$2 SW4.P$1
N$34: SW4.P$2 SW5.P$1
N$35: SW8.P$2 SW9.P$1
N$36: SW9.P$2 SW10.P$1
N$37: SW11.P$2 SW12.P$1
N$38: SW13.P$2 SW14.P$1
N$39: SW14.P$2 SW15.P$1
N$40: SW15.P$2 SW16.P$1
N$41: SW107.P$2 SW119.P$1
N$42: SW17.P$2 SW18.P$1
N$43: SW131.P$2 SW143.P$1
N$44: SW155.P$2 SW167.P$1
N$45: SW143.P$2 SW155.P$1
N$46: SW108.P$2 SW120.P$1
N$47: SW19.P$2 SW20.P$1
N$48: SW132.P$2 SW144.P$1
N$49: SW156.P$2 SW168.P$1
N$50: SW144.P$2 SW156.P$1
N$51: SW109.P$2 SW121.P$1
N$52: SW20.P$2 SW21.P$1
N$53: SW133.P$2 SW145.P$1
N$54: SW157.P$2 SW169.P$1
N$55: SW145.P$2 SW157.P$1
N$56: SW110.P$2 SW122.P$1
N$57: SW21.P$2 SW22.P$1
N$58: SW134.P$2 SW146.P$1
N$59: SW158.P$2 SW170.P$1
N$60: SW146.P$2 SW158.P$1
N$61: SW23.P$2 SW24.P$1
N$62: SW25.P$2 SW26.P$1
N$63: SW26.P$2 SW27.P$1
N$64: SW27.P$2 SW28.P$1
N$65: LED1.A LED6.A LED7.C LED10.A LED11.C LED12.C R2.1
N$66: LED4.C LED5.A LED8.A LED9.C LED10.C LED12.A R1.1
N$67: LED1.C LED2.A LED3.C LED4.A LED5.C LED7.A R3.1
N$68: SW135.P$2 SW147.P$1
N$69: LED2.C LED3.A LED6.C LED8.C LED9.A LED11.A R4.1
N$70: SW147.P$2 SW159.P$1
N$71: SW41.P$4 SW42.P$3
N$72: SW124.P$2 SW136.P$1
N$73: SW136.P$2 SW148.P$1
N$74: SW43.P$4 SW44.P$3
N$75: SW148.P$2 SW160.P$1
N$76: SW44.P$4 SW45.P$3
N$77: SW45.P$4 SW46.P$3
N$78: SW47.P$4 SW48.P$3
N$79: SW49.P$4 SW50.P$3
N$80: SW50.P$4 SW51.P$3
N$81: SW51.P$4 SW52.P$3
N$82: SW53.P$4 SW54.P$3
N$83: SW55.P$4 SW56.P$3
N$84: SW56.P$4 SW57.P$3
N$85: SW57.P$4 SW58.P$3
N$86: SW61.P$4 SW62.P$3
N$87: SW62.P$4 SW63.P$3
N$88: SW66.P$4 SW67.P$3
N$89: SW67.P$4 SW68.P$3
N$90: SW35.P$4 SW36.P$3
N$91: SW37.P$4 SW38.P$3
N$92: SW38.P$4 SW39.P$3
N$93: SW39.P$4 SW40.P$3
N$94: SW7.P$2 SW8.P$1 SW70.P$2
N$95: SW65.P$4 SW66.P$3
N$96: SW60.P$4 SW61.P$3 SW69.P$1
N$97: SW173.P$2 SW174.P$1
N$98: SW175.P$2 SW176.P$1
N$99: SW176.P$2 SW177.P$1
N$100: SW177.P$2 SW178.P$1
N$101: SW74.P$2 SW75.P$1
N$102: SW75.P$2 SW76.P$1
N$103: SW76.P$2 SW77.P$1
N$104: SW80.P$2 SW81.P$1
N$105: SW81.P$2 SW82.P$1
N$106: SW83.P$2 SW84.P$1
N$107: SW85.P$2 SW86.P$1
N$108: SW86.P$2 SW87.P$1
N$109: SW87.P$2 SW88.P$1
N$110: SW89.P$2 SW90.P$1
N$111: SW91.P$2 SW92.P$1
N$112: SW92.P$2 SW93.P$1
N$113: SW93.P$2 SW94.P$1
N$114: SW95.P$2 SW96.P$1
N$115: SW97.P$2 SW98.P$1
N$116: SW98.P$2 SW99.P$1
N$117: SW99.P$2 SW100.P$1
N$118: LED13.A LED18.A LED19.C LED22.A LED23.C LED24.C R6.1
N$119: LED16.C LED17.A LED20.A LED21.C LED22.C LED24.A R5.1
N$120: LED13.C LED14.A LED15.C LED16.A LED17.C LED19.A R7.1
N$121: LED14.C LED15.A LED18.C LED20.C LED21.A LED23.A R8.1
N$122: SW185.P$4 SW186.P$3
N$123: SW187.P$4 SW188.P$3
N$124: SW188.P$4 SW189.P$3
N$125: SW189.P$4 SW190.P$3
N$126: SW191.P$4 SW192.P$3
N$127: SW193.P$4 SW194.P$3
N$128: SW194.P$4 SW195.P$3
N$129: SW195.P$4 SW196.P$3
N$130: SW197.P$4 SW198.P$3
N$131: SW199.P$4 SW200.P$3
N$132: SW200.P$4 SW201.P$3
N$133: SW201.P$4 SW202.P$3
N$134: SW205.P$4 SW206.P$3
N$135: SW206.P$4 SW207.P$3
N$136: SW210.P$4 SW211.P$3
N$137: SW211.P$4 SW212.P$3
N$138: SW179.P$4 SW180.P$3
N$139: SW181.P$4 SW182.P$3
N$140: SW182.P$4 SW183.P$3
N$141: SW183.P$4 SW184.P$3
N$142: SW79.P$2 SW80.P$1 SW214.P$2
N$143: SW209.P$4 SW210.P$3
N$144: SW204.P$4 SW205.P$3 SW213.P$1
N$145: SW245.P$2 SW246.P$1
N$146: SW247.P$2 SW248.P$1
N$147: SW248.P$2 SW249.P$1
N$148: SW249.P$2 SW250.P$1
N$149: SW218.P$2 SW219.P$1
N$150: SW219.P$2 SW220.P$1
N$151: SW220.P$2 SW221.P$1
N$152: SW224.P$2 SW225.P$1
N$153: SW225.P$2 SW226.P$1
N$154: SW227.P$2 SW228.P$1
N$155: SW229.P$2 SW230.P$1
N$156: SW230.P$2 SW231.P$1
N$157: SW231.P$2 SW232.P$1
N$158: SW233.P$2 SW234.P$1
N$159: SW235.P$2 SW236.P$1
N$160: SW236.P$2 SW237.P$1
N$161: SW237.P$2 SW238.P$1
N$162: SW239.P$2 SW240.P$1
N$163: SW241.P$2 SW242.P$1
N$164: SW242.P$2 SW243.P$1
N$165: SW243.P$2 SW244.P$1
N$166: LED25.A LED30.A LED31.C LED34.A LED35.C LED36.C R10.1
N$167: LED28.C LED29.A LED32.A LED33.C LED34.C LED36.A R9.1
N$168: LED25.C LED26.A LED27.C LED28.A LED29.C LED31.A R11.1
N$169: LED26.C LED27.A LED30.C LED32.C LED33.A LED35.A R12.1
N$170: SW257.P$4 SW258.P$3
N$171: SW259.P$4 SW260.P$3
N$172: SW260.P$4 SW261.P$3
N$173: SW261.P$4 SW262.P$3
N$174: SW263.P$4 SW264.P$3
N$175: SW265.P$4 SW266.P$3
N$176: SW266.P$4 SW267.P$3
N$177: SW267.P$4 SW268.P$3
N$178: SW269.P$4 SW270.P$3
N$179: SW271.P$4 SW272.P$3
N$180: SW272.P$4 SW273.P$3
N$181: SW273.P$4 SW274.P$3
N$182: SW277.P$4 SW278.P$3
N$183: SW278.P$4 SW279.P$3
N$184: SW282.P$4 SW283.P$3
N$185: SW283.P$4 SW284.P$3
N$186: SW251.P$4 SW252.P$3
N$187: SW253.P$4 SW254.P$3
N$188: SW254.P$4 SW255.P$3
N$189: SW255.P$4 SW256.P$3
N$190: SW223.P$2 SW224.P$1 SW286.P$2
N$191: SW281.P$4 SW282.P$3
N$192: SW276.P$4 SW277.P$3 SW285.P$1
R0: CN101.5 SW101.P$1 SW102.P$1 SW103.P$1 SW104.P$1 SW105.P$1 SW106.P$1 SW107.P$3 SW108.P$3 SW109.P$3 SW110.P$3 SW111.P$3 SW112.P$3
R1: CN101.6 SW113.P$1 SW114.P$1 SW115.P$1 SW116.P$1 SW117.P$1 SW118.P$1 SW119.P$3 SW120.P$3 SW121.P$3 SW122.P$3 SW123.P$3 SW124.P$3
R2: CN101.7 SW125.P$1 SW126.P$1 SW127.P$1 SW128.P$1 SW129.P$1 SW130.P$1 SW131.P$3 SW132.P$3 SW133.P$3 SW134.P$3 SW135.P$3 SW136.P$3
R3: CN101.8 SW137.P$1 SW138.P$1 SW139.P$1 SW140.P$1 SW141.P$1 SW142.P$1 SW143.P$3 SW144.P$3 SW145.P$3 SW146.P$3 SW147.P$3 SW148.P$3
R4: CN101.9 SW149.P$1 SW150.P$1 SW151.P$1 SW152.P$1 SW153.P$1 SW154.P$1 SW155.P$3 SW156.P$3 SW157.P$3 SW158.P$3 SW159.P$3 SW160.P$3
R5: CN101.10 SW161.P$1 SW162.P$2 SW163.P$1 SW164.P$1 SW165.P$1 SW166.P$1 SW167.P$3 SW168.P$3 SW169.P$3 SW170.P$3 SW171.P$1 SW172.P$2
R6: CN1.5 SW1.P$3 SW6.P$3 SW11.P$3 SW17.P$3 SW23.P$3 SW29.P$3 SW35.P$1 SW41.P$1 SW47.P$1 SW53.P$1 SW59.P$1 SW64.P$1
R7: CN1.6 SW2.P$3 SW7.P$3 SW12.P$3 SW18.P$3 SW24.P$3 SW30.P$3 SW36.P$1 SW42.P$1 SW48.P$1 SW54.P$1 SW60.P$1 SW65.P$1
R8: CN1.7 SW3.P$3 SW8.P$3 SW13.P$3 SW19.P$3 SW25.P$3 SW31.P$3 SW37.P$1 SW43.P$1 SW49.P$1 SW55.P$1 SW61.P$1 SW66.P$1
R9: CN1.8 SW4.P$3 SW9.P$3 SW14.P$3 SW20.P$3 SW26.P$3 SW32.P$3 SW38.P$1 SW44.P$1 SW50.P$1 SW56.P$1 SW62.P$1 SW67.P$1
R10: CN1.9 SW5.P$3 SW10.P$3 SW15.P$3 SW21.P$3 SW27.P$3 SW33.P$3 SW39.P$1 SW45.P$1 SW51.P$1 SW57.P$1 SW63.P$1 SW68.P$1
R11: CN1.10 SW16.P$3 SW22.P$3 SW28.P$3 SW34.P$3 SW40.P$1 SW46.P$1 SW52.P$1 SW58.P$1 SW69.P$2 SW70.P$1 SW71.P$2 SW72.P$1
R12: CN2.5 SW73.P$3 SW78.P$3 SW83.P$3 SW89.P$3 SW95.P$3 SW173.P$3 SW179.P$1 SW185.P$1 SW191.P$1 SW197.P$1 SW203.P$1 SW208.P$1
R13: CN2.6 SW74.P$3 SW79.P$3 SW84.P$3 SW90.P$3 SW96.P$3 SW174.P$3 SW180.P$1 SW186.P$1 SW192.P$1 SW198.P$1 SW204.P$1 SW209.P$1
R14: CN2.7 SW75.P$3 SW80.P$3 SW85.P$3 SW91.P$3 SW97.P$3 SW175.P$3 SW181.P$1 SW187.P$1 SW193.P$1 SW199.P$1 SW205.P$1 SW210.P$1
R15: CN2.8 SW76.P$3 SW81.P$3 SW86.P$3 SW92.P$3 SW98.P$3 SW176.P$3 SW182.P$1 SW188.P$1 SW194.P$1 SW200.P$1 SW206.P$1 SW211.P$1
R16: CN2.9 SW77.P$3 SW82.P$3 SW87.P$3 SW93.P$3 SW99.P$3 SW177.P$3 SW183.P$1 SW189.P$1 SW195.P$1 SW201.P$1 SW207.P$1 SW212.P$1
R17: CN2.10 SW88.P$3 SW94.P$3 SW100.P$3 SW178.P$3 SW184.P$1 SW190.P$1 SW196.P$1 SW202.P$1 SW213.P$2 SW214.P$1 SW215.P$2 SW216.P$1
R18: CN3.5 SW217.P$3 SW222.P$3 SW227.P$3 SW233.P$3 SW239.P$3 SW245.P$3 SW251.P$1 SW257.P$1 SW263.P$1 SW269.P$1 SW275.P$1 SW280.P$1
R19: CN3.6 SW218.P$3 SW223.P$3 SW228.P$3 SW234.P$3 SW240.P$3 SW246.P$3 SW252.P$1 SW258.P$1 SW264.P$1 SW270.P$1 SW276.P$1 SW281.P$1
R20: CN3.7 SW219.P$3 SW224.P$3 SW229.P$3 SW235.P$3 SW241.P$3 SW247.P$3 SW253.P$1 SW259.P$1 SW265.P$1 SW271.P$1 SW277.P$1 SW282.P$1
R21: CN3.8 SW220.P$3 SW225.P$3 SW230.P$3 SW236.P$3 SW242.P$3 SW248.P$3 SW254.P$1 SW260.P$1 SW266.P$1 SW272.P$1 SW278.P$1 SW283.P$1
R22: CN3.9 SW221.P$3 SW226.P$3 SW231.P$3 SW237.P$3 SW243.P$3 SW249.P$3 SW255.P$1 SW261.P$1 SW267.P$1 SW273.P$1 SW279.P$1 SW284.P$1
R23: CN3.10 SW232.P$3 SW238.P$3 SW244.P$3 SW250.P$3 SW256.P$1 SW262.P$1 SW268.P$1 SW274.P$1 SW285.P$2 SW286.P$1 SW287.P$2 SW288.P$1